# Altium PCB adj_net.PcbDoc
Units mm, origin at the board's own origin, x right, y up, seen from the top; angles counter-clockwise.
Board outline 45.51 x 24.2 mm, 4 copper layers (TopLayer, MidLayer1, MidLayer2, BottomLayer), stack 1 mm thick; 16 components, 552 nets, 49 pads, 22 vias.
Unrouted connection lines stored in the file: 13.
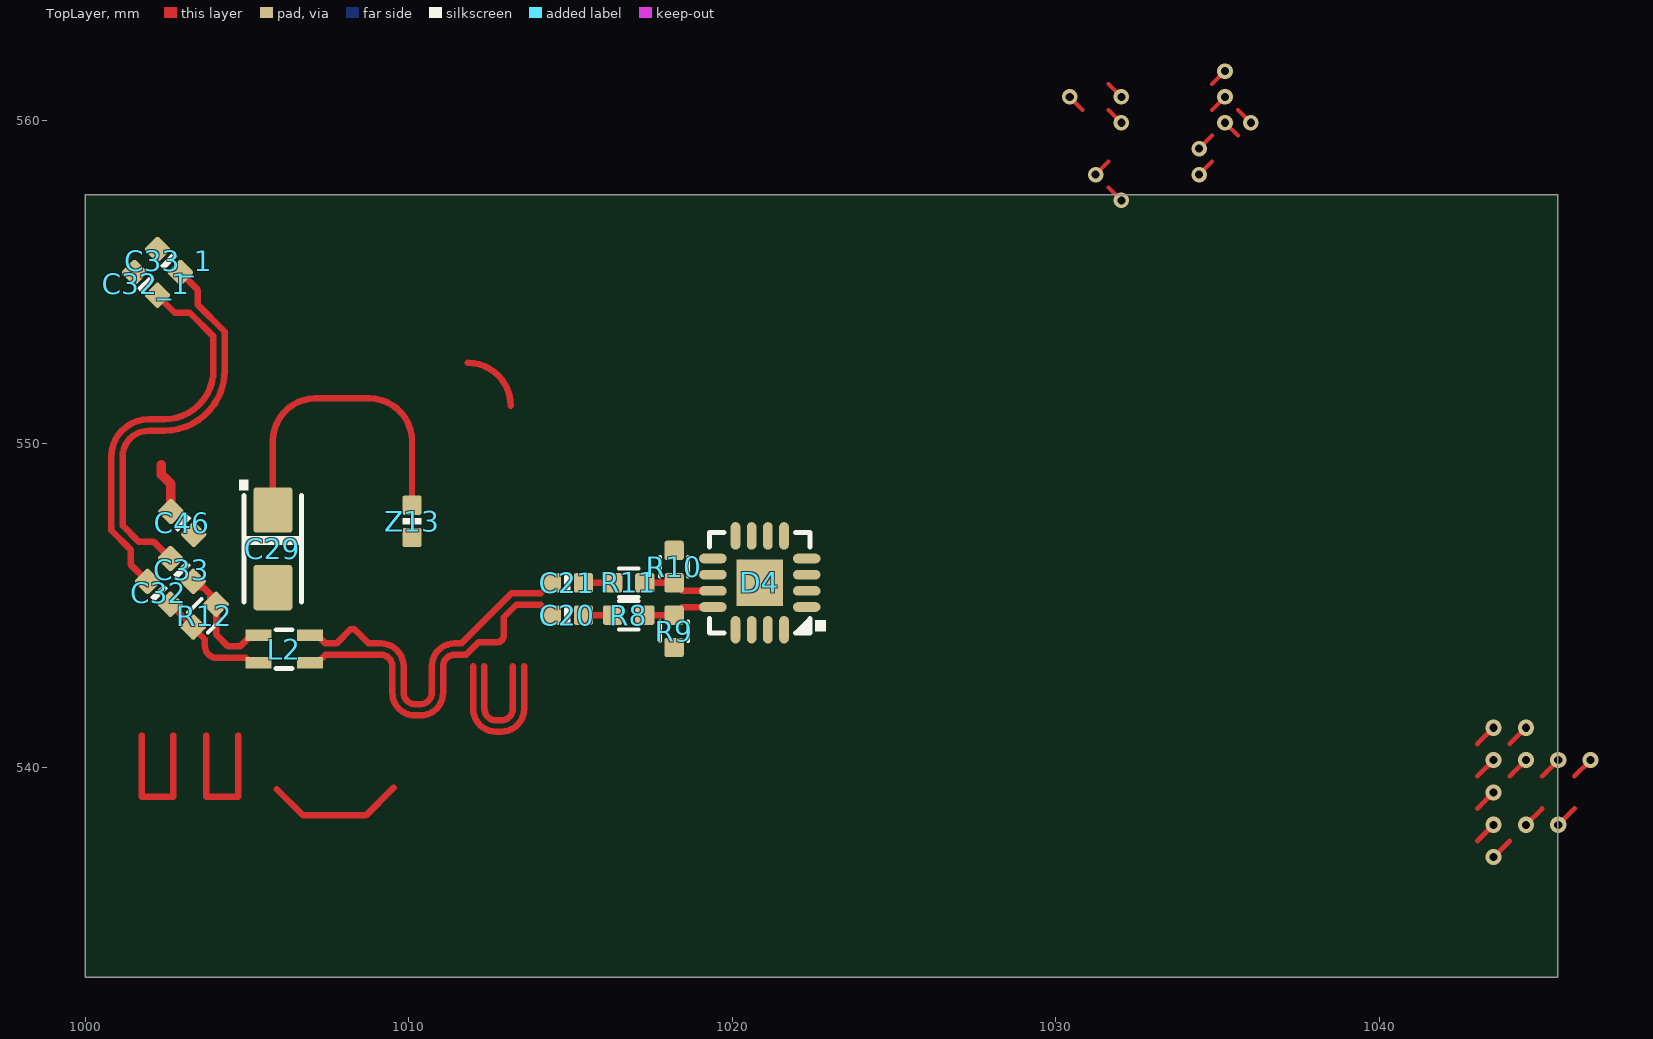
[diagram p0: TopLayer view]
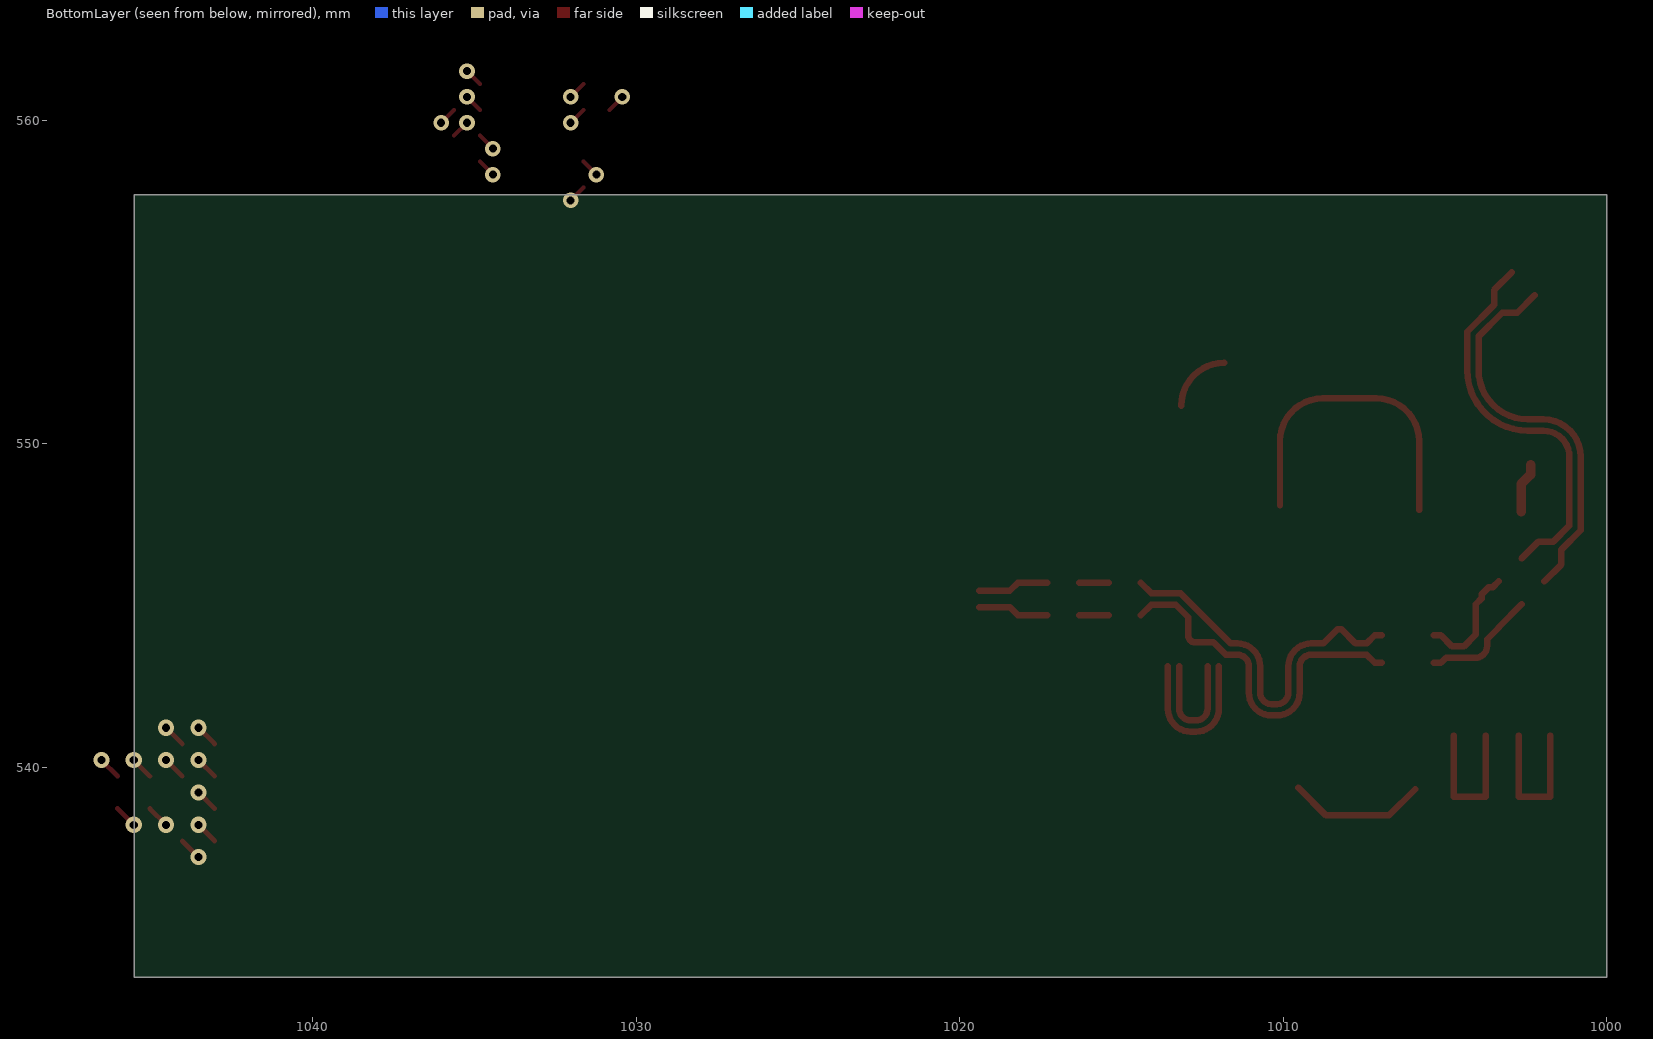
[diagram p1: BottomLayer view, seen from below]
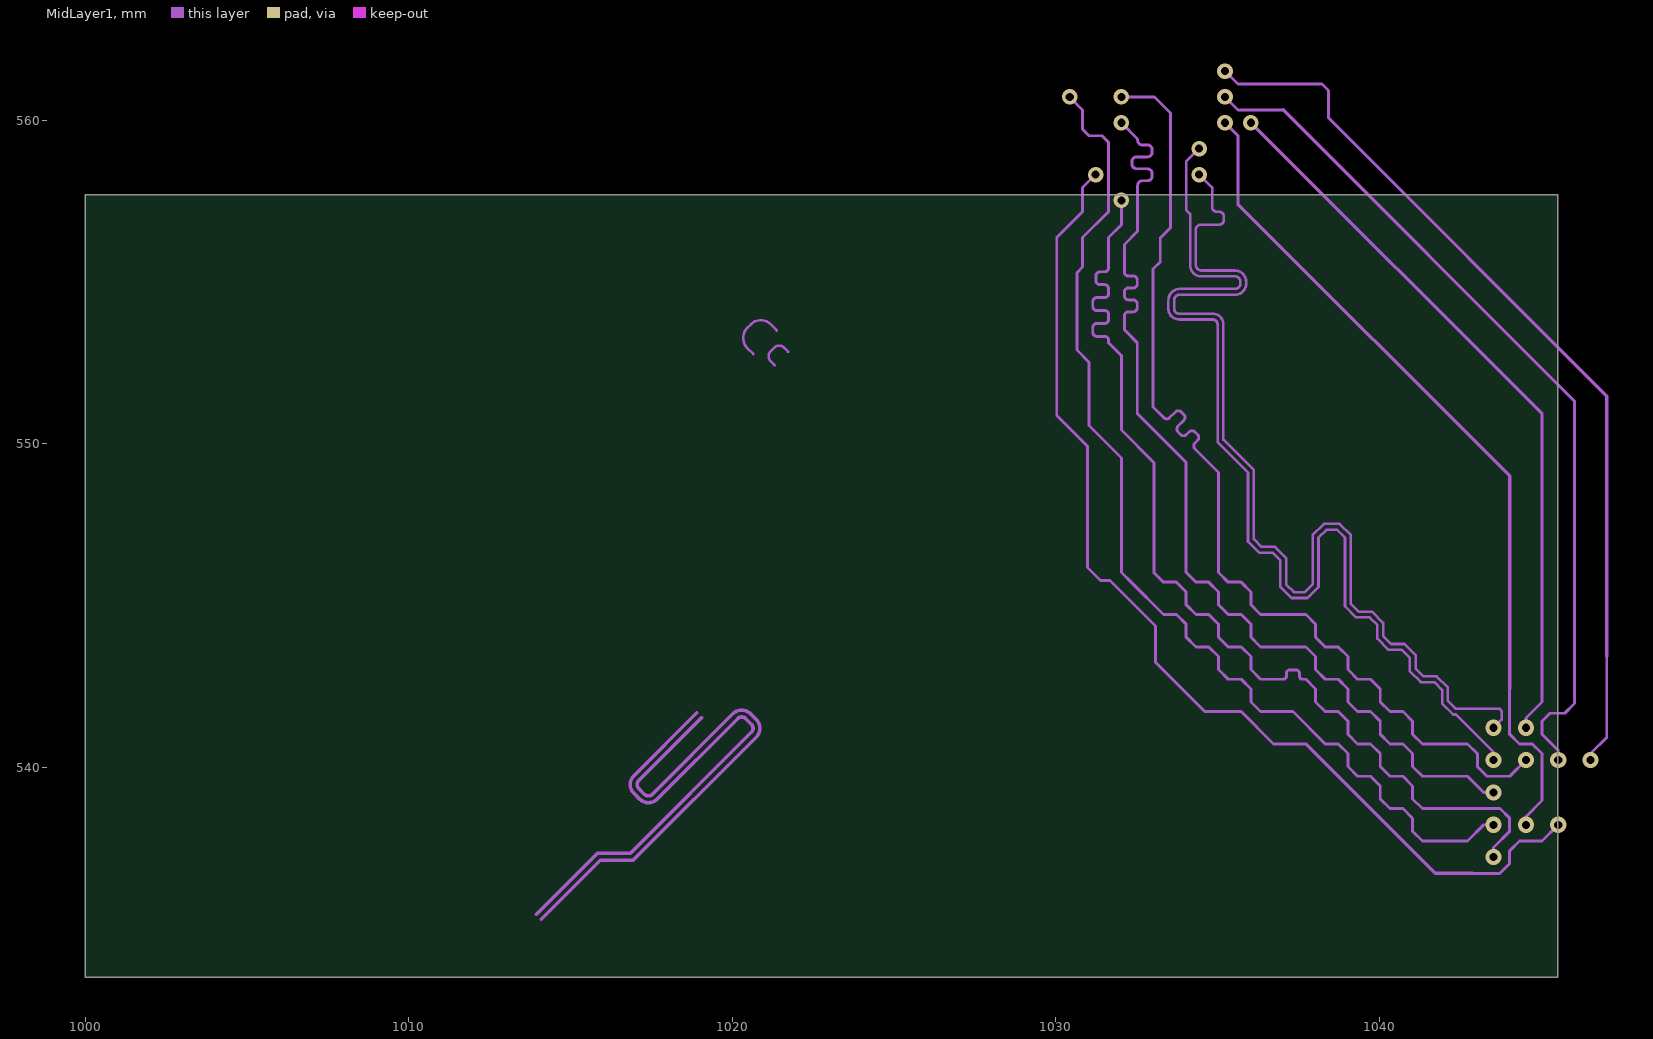
[diagram p2: MidLayer1]

## Layer stack, top to bottom
TopLayer: signal copper 0.035
Dielectric: prepreg 0.254, FR-4 High Tg, Dk 4.3
MidLayer1: signal copper 0.018
Dielectric: core 0.32, FR-4, Dk 4.8
MidLayer2: signal copper 0.018
Dielectric: prepreg 0.32, FR-4, Dk 4.8
BottomLayer: signal copper 0.035

## Board outline
1000,533.5 1045.513,533.5 1045.513,557.7 1000,557.7

## Design rules (kind name [scope] priority, off if disabled: settings)
AssemblyTestPointUsage [All] p1 off:
AssemblyTestpoint [All] p1 off: testpointundercomponent=TRUE minsize=1.016 maxsize=2.54 preferedsize=1.524 minholesize=0 maxholesize=1.016 preferedholesize=0.813 testpointgrid=0.025 usegrid=TRUE gridtolerance=0 allowsidetop=TRUE allowsidebottom=TRUE
Clearance C_TopBot_0.1mm [((IsTrack or IsArc) And (AsMM(Width) < 0.11) and OnOutside) vs ((IsTrack or IsArc) And OnOutside) or IsVia] p1 off: gap=0.1
Clearance C_DDR4_TopBot_ADDR_0.1mm [(IsTrack or IsArc) And (AsMM(Width) < 0.11) and OnOutside and InNetClass('DDR41_ADDR', 'DDR42_ADDR', 'DDR3_ADDR') vs ((IsTrack or IsArc) And (AsMM(Width) < 0.11) and OnOutside) or IsVia] p2: gap=0.1
Clearance C_Diff-Diff_0.5mm [IsTrack vs IsTrack] p3 off: gap=0.5
Clearance C_DDR4_DiffSame_0.1mm [IsTrack vs IsTrack] p4: gap=0.1
Clearance C_DiffSame_0.14mm [IsTrack vs IsTrack] p5: gap=0.1
Clearance C_DDR4-Diff_0.5mm [IsTrack and InNetClass('DDR41', 'DDR42', 'DDR3', 'QDR1', 'QDR2') and OnMid vs IsTrack and InNetClass('DDR41', 'DDR42', 'DDR3', 'QDR1', 'QDR2') and InAnyDifferentialPair and OnMid] p6 off: gap=0.5
Clearance C_DDR4-DDR4_0.3mm [IsTrack and InNetClass('DDR41', 'DDR42', 'DDR3', 'QDR1', 'QDR2', 'ZQ_DDR3') and OnMid vs IsTrack and InNetClass('DDR41', 'DDR42', 'DDR3', 'QDR1', 'QDR2', 'ZQ_DDR3') and OnMid] p7 off: gap=0.3
Clearance C_Diff_All-Via_underFMC_0.185mm [IsTrack and OnMid and InAnyDifferentialPair vs IsVia And (AsMM(X1) > 21) And (AsMM(Y1) > 84) And (AsMM(X1) < 159) And (AsMM(Y1) < 103)] p8: gap=0.185
Clearance C_Diff_DDR4-Via_underFPGA_0.12mm [InNetClass('DDR41', 'DDR42', 'DDR3', 'QDR1', 'QDR2') and InAnyDifferentialPair vs IsVia And (AsMM(X1) > 31) And (AsMM(Y1) > 35) And (AsMM(X1) < 77) And (AsMM(Y1) < 75)] p9: gap=0.12
Clearance C_DDR4-Via_underFPGA_0.2055mm [IsTrack and InNetClass('DDR41', 'DDR42', 'DDR3') vs IsVia And (AsMM(X1) > 31) And (AsMM(Y1) > 35) And (AsMM(X1) < 71) And (AsMM(Y1) < 75)] p10 off: gap=0.206
Clearance C_PolyMid-RF_Via_0.5mm [IsVia and InNetClass('RF') vs InPoly and OnMid] p11: gap=0.5
Clearance C_PolyBottom-RF_Track_0.5mm [(IsTrack or IsArc) and OnBottom and ((AsMM(Width) = 0.48) or (AsMM(Width) = 0.43) or (AsMM(Width) = 0.27) or (AsMM(Width) = 0.22) or (AsMM(Width) = 0.32) or (AsMM(Width) = 0.51) or InNetClass('RF')) vs InPoly] p12: gap=0.5
Clearance C_Poly-RF_Track_0.75mm [(IsTrack or IsArc) and ((AsMM(Width) = 0.48) or (AsMM(Width) = 0.43) or (AsMM(Width) = 0.27) or (AsMM(Width) = 0.22) or (AsMM(Width) = 0.32) or (AsMM(Width) = 0.51) or InNetClass('RF')) vs InPoly] p13: gap=0.75
Clearance C_Poly-RF_Region_0.5mm [IsRegion and InNetClass('RF') vs InPoly and InNet('GND')] p14: gap=0.5
Clearance C_Poly-RF_Pad_Conn_1.0mm [HasFootprint('MMBX*') vs InPoly and InNet('GND')] p15: gap=1
Clearance C_Poly-RF_Pad_Conn_0.7mm [HasFootprint('MMCX-SV', 'SMA-SR') vs InPoly and InNet('GND')] p16: gap=0.7
Clearance C_Poly-RF_Pad_OSC_1.0mm [HasFootprint('OSC508P9.14x14.2x5.3-4', 'TT1224') vs InPoly and InNet('GND')] p17: gap=1
Clearance C_Poly-RF_Pad_0.5mm [HasFootprint('FV1206', 'SOT89', 'SM-22', 'AT224-3', 'AT1521', 'CD542', 'WW107') vs InPoly and InNet('GND')] p18: gap=0.5
Clearance C_Poly-Via0.48_0.09mm [InPoly and Not(InNet('GND')) vs IsVia And (ViaDiameter < AsMM(0.49))] p19: gap=0.09
Clearance C_Poly-Via_0.15mm [InPoly vs IsVia or HasFootprint('TESTPIN*')] p20: gap=0.15
Clearance C_Poly-FID_0.9mm [HasFootprint('FID') vs InPoly] p21: gap=0.9
Clearance C_Poly-Diff/DDR_0.5mm [InPoly and InNet('GND') vs (InAnyDifferentialPair or (InNetClass('DDR41','DDR42'))) and (IsTrack or IsArc)] p22: gap=0.5
Clearance C_Poly-All_0.3mm [InPoly] p23: gap=0.3
Clearance C_RegionFill-KO-0mm [(IsFill or IsRegion) and InNet('SGND', 'GND') vs ((IsTrack or IsArc) and OnLayer('KeepOutLayer')) or (IsPad And (Name = 'Free-Break'))] p24: gap=0
Clearance C_Region-PS1608_0.15mm [IsRegion vs HasFootprint('PS1608')] p25: gap=0.15
Clearance C_Region-All_0.15mm [IsRegion] p26: gap=0.15
Clearance C_Track_0.15mm [IsTrack vs IsTrack] p27: gap=0.15
Clearance C_OnMid_Via_0.1mm [OnMid] p28: gap=0.1
Clearance C_0402_0.11mm [(HasFootprint('CC1005(0402)x06RND')) or (HasFootprint('CC1005(0402)x06G06')) or (HasFootprint('RC1005(0402)x04RND'))] p29: gap=0.11
Clearance C_0.125mm [All] p30: gap=0.125
ComponentClearance ComponentClearance_TP [Hasfootprint('TESTPIN')] p1 off: gap=0 collisioncheckmode=3 verticalgap=0 showdistances=FALSE
ComponentClearance [All] p2 off: gap=0.35 collisioncheckmode=3 verticalgap=0.25 showdistances=TRUE
DiffPairsRouting DiffPairsRouting_BO_0.1mm [All] p1 off: maxlimit=0.14 minlimit=0.1 mostfreqgap=0.14 toplayer_maxgap=0.1 toplayer_prefgap=0.1 midlayer1_mingap=0.14 midlayer2_mingap=0.14 bottomlayer_maxgap=0.1 bottomlayer_prefgap=0.1 maxuncoupledlength=12.7
DiffPairsRouting Diff_DDR4_76Ohm_0.1mm [InDifferentialPairClass('DDR4')] p2: maxlimit=0.1 minlimit=0.1 mostfreqgap=0.1 maxuncoupledlength=12.7
DiffPairsRouting [All] p3: maxlimit=0.15 minlimit=0.14 mostfreqgap=0.15 toplayer_mingap=0.15 midlayer1_maxgap=0.14 midlayer1_prefgap=0.14 midlayer2_maxgap=0.14 midlayer2_prefgap=0.14 bottomlayer_mingap=0.15 maxuncoupledlength=12.7
FabricationTestPointUsage TestPointUsage [All] p1 off: valid=0 allowmultiple=FALSE
FabricationTestpoint Testpoint [All] p1 off: side=3 testpointundercomponent=TRUE minsize=1.016 maxsize=2.54 preferedsize=1.524 minholesize=0.508 maxholesize=1.016 preferedholesize=0.813 testpointgrid=0.025 allowsidetop=TRUE allowsidebottom=TRUE usegrid=TRUE gridtolerance=0
FanoutControl Fanout_SOIC [IsSOIC] p1 off: bgadir=Out bgaviamode=Centered fanoutstyle=Auto fanoutdirection=Alternating viagrid=0.025 // Fanout_SOIC (Default Rule)
FanoutControl Fanout_Small [(CompPinCount < 5)] p2 off: bgadir=Out bgaviamode=Centered fanoutstyle=Auto fanoutdirection=OutThenIn viagrid=0.025 // Fanout_Small (Default Rule)
FanoutControl Fanout_LCC [IsLCC] p3 off: bgadir=Out bgaviamode=Centered fanoutstyle=Auto fanoutdirection=Alternating viagrid=0.025 // Fanout_LCC (Default Rule)
FanoutControl Fanout_Default [All] p4 off: bgadir=Out bgaviamode=Centered fanoutstyle=Auto fanoutdirection=Alternating viagrid=0.025 // Fanout_Default (Default Rule)
FanoutControl Fanout_BGA [IsBGA] p5 off: bgadir=Out bgaviamode=Centered fanoutstyle=Auto fanoutdirection=Alternating viagrid=0.025 // Fanout_BGA (Default Rule)
Height Height_Bot_1.3mm [OnBottom] p1 off: minheight=0 maxheight=1.31 prefheight=1.3
Height [All] p2: minheight=0 maxheight=25.4 prefheight=12.7
HoleSize [All] p1 off: absolutevalues=TRUE maxlimit=3.2 minlimit=0.025 maxpercent=80.000 minpercent=20.000
LayerPairs [All] p1 off: enforce=TRUE
Length [All xor InNet('GND')] p1: maxlimit=2540 minlimit=0
MinimumSolderMaskSliver [All] p1: minsoldermaskwidth=0.12
NetAntennae [All] p1: netantennaetolerance=0.5
PlaneClearance PPC_50Ohm_0.7mm [(IsPad or Isvia) and InNetClass('RF')] p1: clearance=1.05
PlaneClearance PPC_Screw_1.2mm_FMC [HasFootprintPad('FMC1*','FMC')] p2: clearance=1.2 // for hole > 2.1 mm
PlaneClearance PPC_Screw_1.2mm [IsPad And ((AsMM(HoleDiameter) > 2.1) And (Component = 'Free'))] p3: clearance=1.2 // for hole > 2.1 mm
PlaneClearance PPC_Screw_1.2mm_MG [HasFootprint('MULTIGIG-GUIDE-DC/RND')] p4: clearance=1.2 // for hole > 2.1 mm
PlaneClearance PPC_Via(0.48)_0.2mm [IsVia And (ViaDiameter < AsMM(0.49))] p5: clearance=0.2
PlaneClearance PPC_Via(All)_0.25mm [IsVia] p6: clearance=0.25
PlaneClearance PPC_All_0.4mm [All] p7: clearance=0.4
PlaneConnect PPCS_Class_Direct [InComponentClass('Poly Direct') or InPadClass('Poly Direct')] p1: planeconnectstyle=Direct reliefexpansion=0.508 reliefentries=4 reliefconductorwidth=0.254 reliefairgap=0.254
PlaneConnect PPCS_MTH_Pad_Direct [HasFootprintPad('FMC1*','FMC*') or HasFootprintPad ('','Q*') or HasFootprintPad ('','BL') or HasFootprintPad ('NGFF TYPE M 4.2MM','MH') or (IsPad And (Name Like 'Free*'))] p2: planeconnectstyle=Direct reliefexpansion=0.508 reliefentries=4 reliefconductorwidth=0.254 reliefairgap=0.254
PlaneConnect PPCS_MTH_FP_Direct [HasFootprint('TESTPIN*', 'Z-PACK*', 'MULTIGIG*', 'iPass+HD1x1*', 'HEATSINK*', 'Скоба*', 'AB4512', 'BOSS 0.8MM', 'NGFF BOSS 2.48MM', 'PB-SMD-RA-LP', 'VITA67-8PR')] p3: planeconnectstyle=Direct reliefexpansion=0.508 reliefentries=4 reliefconductorwidth=0.254 reliefairgap=0.254
PlaneConnect PPCS_12V_0.75mm [HasFootprint('POW6PR-12V')] p4: planeconnectstyle=Relief reliefexpansion=0.45 reliefentries=4 reliefconductorwidth=0.75 reliefairgap=0.3
PlaneConnect PPCS_Pad_0.4mm [IsPad] p5: planeconnectstyle=Relief reliefexpansion=0.3 reliefentries=4 reliefconductorwidth=0.3 reliefairgap=0.25
PlaneConnect PPCS_All_Direct [All] p6: planeconnectstyle=Direct reliefexpansion=0.508 reliefentries=4 reliefconductorwidth=0.254 reliefairgap=0.254
PolygonConnect PCS_Class_Direct [InComponentClass('Poly Direct') or InPadClass('Poly Direct')] p1: connectstyle=Direct reliefconductorwidth=0.254 reliefentries=4 polygonreliefangle="90 Angle" airgapwidth=0.254
PolygonConnect PCS_NotConnect_7300 [(IsComponent) And (Comment = 'TPS7A7300RGW')] p2: connectstyle=NoConnect reliefconductorwidth=0.254 reliefentries=4 polygonreliefangle="90 Angle" airgapwidth=0.254
PolygonConnect PCS_NotConnect_FMC [IsPad and OnTop and HasFootprint('FMC1CG-SHPC-10-CC')] p3: connectstyle=NoConnect reliefconductorwidth=0.254 reliefentries=4 polygonreliefangle="90 Angle" airgapwidth=0.254
PolygonConnect PCS_NotConnect [InPadClass('Pad_adress') or Hasfootprint('RCAV80P*', 'LGA40P*', 'QFN65P5X5X1-20TP3.15-I', 'TSOP65P4.4x7.8x1.2-24x6.4', 'TSOP50P3.0x4.0x1.1-16x4.9', 'SOT23-1.40x2.15x1.00-6/0.65x2.4', 'SOT723')] p4: connectstyle=NoConnect reliefconductorwidth=0.254 reliefentries=4 polygonreliefangle="90 Angle" airgapwidth=0.254
PolygonConnect PCS_BGA_Direct [HasFootprint('BGA16X16X5.21-144/1.27X0.63', 'BGA9X15X5.01-77/1.27X0.63')] p5: connectstyle=Direct reliefconductorwidth=0.254 reliefentries=4 polygonreliefangle="90 Angle" airgapwidth=0.254
PolygonConnect PCS_BGA_NotConnect [HasFootprint('BGA*')] p6: connectstyle=NoConnect reliefconductorwidth=0.3 reliefentries=4 polygonreliefangle="90 Angle" airgapwidth=0.3
PolygonConnect PCS_12V_0.75mm [HasFootprint('POW6PR-12V')] p7: connectstyle=Relief reliefconductorwidth=0.75 reliefentries=4 polygonreliefangle="45 Angle" airgapwidth=0.3
PolygonConnect PCS_SMD_Chips_0.3mm [HasFootprint('CC1005*', 'RC1005*', 'FB1005*', 'SOT23*', 'LEDC*') vs (InNet('GND'))] p8: connectstyle=Relief reliefconductorwidth=0.3 reliefentries=4 polygonreliefangle="90 Angle" airgapwidth=0.3
PolygonConnect PCS_TH_Direct [HasFootprint('FH0.8*', 'MULTIGIG*', 'IDC14PV-2mm-SMD', 'SMA-SR') or HasFootprintPad('FMC1*','FMC*')] p9: connectstyle=Direct reliefconductorwidth=0.3 reliefentries=4 polygonreliefangle="90 Angle" airgapwidth=0.3
PolygonConnect PCS_TH_0.3mm [IsPad And ((AsMM(HoleDiameter) < 2.0) And (AsMM(HoleDiameter) > 0.5))] p10: connectstyle=Relief reliefconductorwidth=0.3 reliefentries=4 polygonreliefangle="45 Angle" airgapwidth=0.3
PolygonConnect PCS_All_Direct [All] p11: connectstyle=Direct reliefconductorwidth=0.508 reliefentries=4 polygonreliefangle="90 Angle" airgapwidth=0.254
RoutingCorners [All] p1 off: cornerstyle=45-Degree minsetback=0.2 maxsetback=0.2
RoutingLayers [All] p1 off: top layer_v5=TRUE mid layer 1_v5=TRUE mid layer 2_v5=TRUE bottom layer_v5=TRUE
RoutingPriority [All] p1 off: routingpriority=0
RoutingTopology [All] p1 off: topology=Shortest
RoutingVias RoutingVias_RF_0.25/0.5mm [InNetClass('RF')] p1: holewidth=0.25 width=0.5 viastyle="Through Hole" minholewidth=0.25 minwidth=0.5 maxholewidth=0.25 maxwidth=0.5
RoutingVias [All] p2: holewidth=0.25 width=0.5 viastyle="Through Hole" minholewidth=0.25 minwidth=0.5 maxholewidth=0.3 maxwidth=0.6
ShortCircuit ShortCircuit_Fill [(IsFill or IsRegion) and InNet('SGND', 'GND') vs (IsTrack or IsArc) and OnLayer('KeepOutLayer')] p1: allowed=TRUE
ShortCircuit [All] p2: allowed=FALSE
SilkToSolderMaskClearance SilkscreenOverComponentPads [IsPad vs IsText] p1: minsilkscreentomaskgap=0.05 clearancetoexposedcopper=TRUE
SolderMaskExpansion SolderMaskExpansion_BGA [HasFootprint('BGA35x35x3.5-1156/1.0x0.45')] p1: expansion=0.05
SolderMaskExpansion [All] p2: expansion=0.025
Width Width_SE_BO_0.1mm [All and not(InAnyDifferentialPair)] p1 off: maxlimit=0.1 minlimit=0.08 preferedwidth=0.1 toplayer_minwidth=0.1 midlayer1_prefwidth=0.08 midlayer2_prefwidth=0.08 bottomlayer_minwidth=0.1 minimp=50.000000 maximp=50.000000 favimp=50.000000
Width Width_Diff_BO_0.1mm [InAnyDifferentialPair] p2 off: maxlimit=0.1 minlimit=0.08 preferedwidth=0.1 toplayer_minwidth=0.1 midlayer1_maxwidth=0.08 midlayer1_prefwidth=0.08 midlayer2_maxwidth=0.08 midlayer2_prefwidth=0.08 bottomlayer_minwidth=0.1 minimp=50.000000 maximp=50.000000 favimp=50.000000
Width Width_DDR4_Diff_L1_76Ohm_0.08mm [InNetClass('DDR41', 'DDR42', 'DDR3') and InAnyDifferentialPair] p3: maxlimit=0.15 minlimit=0.08 preferedwidth=0.1 toplayer_minwidth=0.1 midlayer1_maxwidth=0.08 midlayer1_prefwidth=0.08 midlayer2_maxwidth=0.08 midlayer2_prefwidth=0.08 bottomlayer_minwidth=0.1 minimp=50.000000 maximp=50.000000 favimp=50.000000
Width Width_Diff [InAnyDifferentialPair] p4: maxlimit=0.2 minlimit=0.08 preferedwidth=0.2 toplayer_minwidth=0.2 midlayer1_maxwidth=0.08 midlayer1_prefwidth=0.08 midlayer2_maxwidth=0.08 midlayer2_prefwidth=0.08 bottomlayer_minwidth=0.2 minimp=50.000000 maximp=50.000000 favimp=50.000000
Width Width_DDR4(ADDR)_41Ohm_0.08mm [InNetClass('DDR41_ADDR', 'DDR42_ADDR', 'DDR3_ADDR') and Not(InAnyDifferentialPair)] p5: maxlimit=0.125 minlimit=0.08 preferedwidth=0.1 toplayer_minwidth=0.1 midlayer1_maxwidth=0.08 midlayer1_prefwidth=0.08 midlayer2_maxwidth=0.08 midlayer2_prefwidth=0.08 bottomlayer_minwidth=0.1 minimp=50.000000 maximp=50.000000 favimp=50.000000
Width Width_DDR4(DQ)_39Ohm_0.089mm [InNetClass('DDR41', 'DDR42', 'DDR3', 'QDR1') and Not(InAnyDifferentialPair)] p6: maxlimit=0.15 minlimit=0.089 preferedwidth=0.1 toplayer_minwidth=0.1 midlayer1_maxwidth=0.089 midlayer1_prefwidth=0.089 midlayer2_maxwidth=0.089 midlayer2_prefwidth=0.089 bottomlayer_minwidth=0.1 minimp=50.000000 maximp=50.000000 favimp=50.000000
Width [All] p7: maxlimit=3 minlimit=0.1 preferedwidth=0.15 toplayer_minwidth=0.125 midlayer1_prefwidth=0.1 midlayer2_prefwidth=0.1 bottomlayer_minwidth=0.125 minimp=50.000000 maximp=50.000000 favimp=50.000000
4 further rules are at their usual default settings.

## Classes and differential pairs
component class msch_rf_v10-03_prepll_lmx: C29 C32 C33 C46 R12 Z13
component class msch_rf_v10-01_prepll_in: C20 C21 D4 L2 R8 R9 R10 R11
net class PWR_A: +3.3VHFB +3.3VHMIX +3.3VHPLL +3.3VHREF +3.3VHRF +3.3VZPLL +3.3VZREF +4.0VRF_UP +5.0VCH1 +5.0VCH2 +5.0VHFB +5.0VRF +5.0VZMIX_UP +5.0VZPLL +6.0VRF_UP -3.3VA_UP -5.0VRF_UP
net class A_REF: FB_LF_N FB_LF_P HPLL_01_N HPLL_01_P LO_01_N LO_01_P OSC_LMX1_IN_N OSC_LMX1_IN_P OSC_LMX1_N OSC_LMX1_P OSC_LMX2_IN_N OSC_LMX2_IN_P OSC_LMX2_N OSC_LMX2_P REF_200M_N REF_200M_P ZPLL_HF_N ZPLL_HF_OUT_N ZPLL_HF_OUT_P ZPLL_HF_P ZPLL_N ZPLL_P
net class RF: NetC22_1 NetC184_1 NetC185_1 NetC186_1 NetC187_1 NetC190_2 NetC191_2 NetC192_2 NetC193_2 NetZ29_4 NetZ29_6 ZPLL_100M_UP
net class DDDR41_D0: DDR41_DM0 DDR41_DQ00 DDR41_DQ01 DDR41_DQ02 DDR41_DQ03 DDR41_DQ04 DDR41_DQ05 DDR41_DQ06 DDR41_DQ07 DDR41_DQS0_N DDR41_DQS0_P
differential pair ZPLL: +ZPLL_P -ZPLL_N
differential pair OSC_LMX1: +OSC_LMX1_P -OSC_LMX1_N
differential pair OSC_LMX1_IN: +OSC_LMX1_IN_P -OSC_LMX1_IN_N
differential pair PS_DDR4_DQS8: +PS_DDR4_DQS8_P -PS_DDR4_DQS8_N
differential pair FMC_DP8_M2C: +FMC_DP8_M2C_N -FMC_DP8_M2C_P
differential pair DDR41_DQS0: +DDR41_DQS0_N -DDR41_DQS0_P

## Components (designator, comment, footprint, x,y, rotation, side; value= is the part's Value field where it differs from the comment)
C20 "1000" CC1005(0402)x06 1014.9,544.7 r180 top
C21 "1000" CC1005(0402)x06 1014.9,545.7 r180 top
C29 "47.0-10V ESR200" CCP3216(A)x10LB 1005.8,546.75 r90 top
C32 "0.01" CC1005(0402)x06 1002.278,545.39 r135 top
C32_1 "0.01" CC1005(0402)x06 1001.878,554.94 r135 top (schematic designator C32)
C33 "0.01" CC1005(0402)x06 1002.985,546.097 r135 top
C33_1 "0.01" CC1005(0402)x06 1002.585,555.647 r135 top (schematic designator C33)
C46 "1.0" CC1005(0402)x06 1003,547.55 r315 top
D4 "ADCLK925BCPZ" QFN50P3x3x0.8-16TP1.45-I 1020.85,545.7 r180 top
L2 "DLW21SN900SQ2" DLW21 1006.15,543.65 r180 top
R8 "10.0" RC1005(0402)x04 1016.8,544.7 r180 top
R9 "200" RC1005(0402)x04 1018.2,544.2 r270 top
R10 "200" RC1005(0402)x04 1018.2,546.2 r90 top
R11 "10.0" RC1005(0402)x04 1016.8,545.7 r180 top
R12 "100" RC1005(0402)x04 1003.692,544.683 r225 top
Z13 "BLM15HG601SN1" FB1005(0402)x05 1010.1,547.6 r90 top

## Footprints (in the part's own frame and the unit in brackets; to place one, negate y for a bottom-side part, rotate by r counter-clockwise, add the part's x,y. Pads: shape width x height; smd on the part's side, far side on the other; paste and mask are expansions set on the pad)
CC1005(0402)x06 [mm] "1005(0402) Chip-Capacitor"
  rrect25% 0.6x0.6 smd paste+0.025 mask+0.025: 1(-0.5,0) 2(0.5,0)
  silkscreen extent -0.1,-0.3 0.1,0.3, body extent -0.5,-0.25 0.5,0.25, height 0.6
CCP3216(A)x10LB [mm] "3216(I) Tantalum Chip-Capacitor H=1.0mm Black"
  rrect14% 1.4x1.2 smd: 1(1.2,0) 2(-1.2,0)
  silkscreen extent -1.65,-0.89 2.15,1.05, body extent -1.6,-0.8 1.6,0.8, height 1
DLW21 [mm] "DLW21 Common Mode Choke Coil (Murata)"
  rect 0.8x0.35 smd: 1(-0.8,0.425) 2(0.8,0.425) 3(0.8,-0.425) 4(-0.8,-0.425)
  silkscreen extent -0.25,-0.6 0.25,0.6, body extent -1.1,-0.7 1.1,0.7, height 1.1
FB1005(0402)x05 [mm] "1005(0402) Chip-Ferrite 0.55mm Height"
  rrect25% 0.6x0.6 smd paste+0.025 mask+0.025: 1(-0.5,0) 2(0.5,0)
  silkscreen extent -0.1,-0.3 0.1,0.3, body extent -0.5,-0.25 0.5,0.25, height 0.55
QFN50P3x3x0.8-16TP1.45-I [mm] "QFN Type I 0.5mm Pitch, 16 Pin, 3.0mm X 3.0mm X 0.8mm Body with Thermal Pad 1.45mm"
  oval 0.85x0.3 smd: 1(-1.45,0.75) 2(-1.45,0.25) 3(-1.45,-0.25) 4(-1.45,-0.75) 9(1.45,-0.75) 10(1.45,-0.25) 11(1.45,0.25) 12(1.45,0.75)
  oval 0.3x0.85 smd: 5(-0.75,-1.45) 6(-0.25,-1.45) 7(0.25,-1.45) 8(0.75,-1.45) 13(0.75,1.45) 14(0.25,1.45) 15(-0.25,1.45) 16(-0.75,1.45)
  rect 1.45x1.45 smd paste-0.75 mask-0.75: TP(0,0)
  silkscreen extent -2.05,-1.55 1.55,1.55, body extent -1.52,-1.52 1.53,1.53, height 0.8
RC1005(0402)x04 [mm] "1005(0402) Chip-Resistor"
  rrect25% 0.6x0.6 smd paste+0.025 mask+0.025: 1(-0.5,0) 2(0.5,0)
  silkscreen extent -0.3,-0.44 0.3,0.44, body extent -0.5,-0.25 0.5,0.25, height 0.4

## Part data
C20 C21: library part "CC0402 NP0 pF1000 V50", "Ceramic Chip-capacitor 0402"
C29: library part "SMEI 47.0-10V ESR200", "Tantalum Polymer SMD capacitor size I"
C32 C32_1 C33 C33_1: library part "CC0402 X7R uF0.01 V25", "Ceramic Chip-capacitor 0402"
C46: library part "CC0402 X5R uF1.0 V25", "Ceramic Chip-capacitor 0402"
D4: "Ultrafast ECL Clock/Data Buffer 1:2"
L2: "Chip Common Mode Wire Wound EMI Suppression Filters (EMIFRL)"
R8 R11: library part "1% R0402-10.0", "Chip Resistor 0402"
R9 R10: library part "1% R0402-200", "Chip Resistor 0402"
R12: library part "1% R0402-100", "Chip Resistor 0402"
Z13: "SMD Ferrite Bead 0.3A 600 Ohm(100MHz) for GHz Band Noise"

## Via types
v1: diameter 0.5, hole 0.25, TopLayer to BottomLayer, tented both sides, 11 vias
v2: diameter 0.48, hole 0.25, TopLayer to BottomLayer, tented both sides, 11 vias

## Nets (pads, with @x,y where several pads share a name; then routed paths per layer and width w, separated by ;. In a path a pad name is that pad's centre, name@x,y a point inside that pad or via, vN(x,y) a via of type N, cw(c..) or ccw(c..) an arc to the next point about the centre after c; other vN are vias at no path point)
+3.3VHFB: 
+3.3VHMIX: 
+3.3VHPLL: 
+3.3VHREF: 
+3.3VHRF: 
+3.3VZPLL: Z13.1
+3.3VZREF: 
+4.0VRF_UP: 
+5.0VCH1: 
+5.0VCH2: 
+5.0VHFB: 
+5.0VRF: 
+5.0VZMIX_UP: 
+5.0VZPLL: 
+6.0VRF_UP: 
-3.3VA_UP: 
-5.0VRF_UP: 
DDR41_DM0:  | length 33.2
  TopLayer w0.125: 1031.63,557.919 v2(1032.03,557.519)
  TopLayer w0.15: v1(1043.53,537.219) 1044.03,537.719
  MidLayer1 w0.089: v2(1032.03,557.519) 1032.03,556.769 1031.63,556.369 1031.63,555.433 cw(c1031.511,555.433) 1031.511,555.314 1031.362,555.314 ccw(c1031.362,555.194) 1031.243,555.194 1031.243,555.034 ccw(c1031.362,555.034) 1031.362,554.915 1031.511,554.915 cw(c1031.511,554.795) 1031.63,554.795 1031.63,554.635 cw(c1031.511,554.635) 1031.511,554.516 1031.263,554.516 ccw(c1031.263,554.396) 1031.144,554.396 1031.144,554.236 ccw(c1031.263,554.236) 1031.263,554.117 1031.511,554.117 cw(c1031.511,553.997) 1031.63,553.997 1031.63,553.837 cw(c1031.511,553.837) 1031.511,553.718 1031.263,553.718 ccw(c1031.263,553.598) 1031.144,553.598 1031.144,553.438 ccw(c1031.263,553.438) 1031.263,553.319 1031.511,553.319 cw(c1031.511,553.199) 1031.63,553.199 1031.63,553.119 1032.03,552.719 1032.03,550.419 1033.03,549.419 1033.03,546.019 1033.33,545.719 1033.73,545.719 1034.03,545.419 1034.03,545.019 1034.33,544.719 1034.73,544.719 1035.03,544.419 1035.03,544.019 1035.33,543.719 1035.73,543.719 1036.03,543.419 1036.03,543.019 1036.33,542.719 1037.032,542.719 ccw(c1037.032,542.819) 1037.132,542.819 1037.132,542.906 cw(c1037.232,542.906) 1037.232,543.006 1037.431,543.006 cw(c1037.431,542.906) 1037.531,542.906 1037.531,542.819 ccw(c1037.631,542.819) 1037.631,542.719 1037.73,542.719 1038.03,542.419 1038.03,542.019 1038.33,541.719 1038.73,541.719 1039.03,541.419 1039.03,541.019 1039.33,540.719 1039.73,540.719 1040.03,540.419 1040.03,540.019 1040.33,539.719 1040.73,539.719 1041.03,539.419 1041.03,539.019 1041.33,538.719 1043.73,538.719 1044.03,538.419 1044.03,538.019 1043.53,537.519 v1(1043.53,537.219)
DDR41_DQ00:  | length 27.5
  TopLayer w0.125: v2(1035.23,559.919) 1035.63,559.519
  TopLayer w0.15: v1(1044.53,538.219) 1045.03,538.719
  MidLayer1 w0.089: v2(1035.23,559.919) 1035.63,559.519 1035.63,558.821 ; 1044.03,542.419 1044.03,541.019 1044.33,540.719 1044.73,540.719 1045.03,540.419 1045.03,538.969 1044.53,538.469 v1(1044.53,538.219)
  MidLayer1 w0.1: 1035.63,558.821 1035.63,557.404 1044.03,549.004 1044.03,542.419
DDR41_DQ01:  | length 34.3
  TopLayer w0.125: v2(1031.23,558.319) 1031.63,558.719
  TopLayer w0.15: v1(1045.53,538.219) 1046.03,538.719
  MidLayer1 w0.089: v2(1031.23,558.319) 1030.83,557.919 1030.83,557.169 1030.03,556.369 1030.03,550.869 1030.98,549.919 1030.98,546.169 1031.38,545.769 1031.68,545.769 1033.08,544.369 1033.08,543.244 1034.605,541.719 1035.73,541.719 1036.73,540.719 1037.73,540.719 ; 1042.882,536.719 1043.73,536.719 1044.03,537.019 1044.03,537.419 1044.33,537.719 1045.03,537.719 v1(1045.53,538.219)
  MidLayer1 w0.1: 1037.73,540.719 1041.73,536.719 1042.882,536.719
DDR41_DQ02:  | length 28
  TopLayer w0.125: 1034.83,560.319 v2(1035.23,560.719)
  TopLayer w0.15: 1045.03,539.719 v1(1045.53,540.219)
  MidLayer1 w0.089: v2(1035.23,560.719) 1035.63,560.319 1037.03,560.319 ; v1(1045.53,540.219) 1045.53,540.519 1045.03,541.019 1045.03,541.419 1045.28,541.669 1045.73,541.669 1046.03,541.969 1046.03,543.419
  MidLayer1 w0.1: 1037.03,560.319 1046.03,551.319 1046.03,543.419
DDR41_DQ03:  | length 32.9
  TopLayer w0.125: 1031.63,560.319 v2(1032.03,559.919)
  TopLayer w0.15: 1043.03,538.719 v1(1043.53,539.219)
  MidLayer1 w0.089: v2(1032.03,559.919) 1032.53,559.419 1032.53,559.382 ccw(c1032.678,559.382) 1032.678,559.235 1032.832,559.235 cw(c1032.832,559.087) 1032.979,559.087 1032.979,559.013 cw(c1032.832,559.013) 1032.832,558.866 1032.5,558.866 ccw(c1032.5,558.718) 1032.352,558.718 1032.352,558.644 ccw(c1032.5,558.644) 1032.5,558.497 1032.832,558.497 cw(c1032.832,558.349) 1032.979,558.349 1032.979,558.275 cw(c1032.832,558.275) 1032.832,558.128 1032.678,558.128 ccw(c1032.678,557.98) 1032.53,557.98 1032.53,556.569 1032.119,556.158 1032.119,555.311 ccw(c1032.248,555.311) 1032.248,555.182 1032.39,555.182 cw(c1032.39,555.053) 1032.519,555.053 1032.519,554.942 cw(c1032.39,554.942) 1032.39,554.813 1032.248,554.813 ccw(c1032.248,554.684) 1032.119,554.684 1032.119,554.573 ccw(c1032.248,554.573) 1032.248,554.444 1032.39,554.444 cw(c1032.39,554.315) 1032.519,554.315 1032.519,554.204 cw(c1032.39,554.204) 1032.39,554.075 1032.248,554.075 ccw(c1032.248,553.946) 1032.119,553.946 1032.119,553.522 1032.519,553.122 1032.519,550.93 1034.03,549.419 1034.03,546.019 1034.33,545.719 1034.73,545.719 1035.03,545.419 1035.03,545.019 1035.33,544.719 1035.73,544.719 1036.03,544.419 1036.03,544.019 1036.33,543.719 1037.73,543.719 1038.03,543.419 1038.03,543.019 1038.33,542.719 1038.73,542.719 1039.03,542.419 1039.03,542.019 1039.33,541.719 1039.73,541.719 1040.03,541.419 1040.03,541.019 1040.33,540.719 1040.73,540.719 1041.03,540.419 1041.03,540.019 1041.33,539.719 1042.73,539.719 1043.23,539.219 v1(1043.53,539.219)
DDR41_DQ04:  | length 23.9
  TopLayer w0.125: 1035.63,560.319 v2(1036.03,559.919)
  TopLayer w0.15: 1044.03,540.719 v1(1044.53,541.219)
  MidLayer1 w0.089: v1(1044.53,541.219) 1044.53,541.519 1045.03,542.019 1045.03,543.419
  MidLayer1 w0.1: v2(1036.03,559.919) 1045.03,550.919 1045.03,543.419
DDR41_DQ05:  | length 34.2
  TopLayer w0.125: v2(1030.43,560.719) 1030.83,560.319
  TopLayer w0.15: 1043.03,537.719 v1(1043.53,538.219)
  MidLayer1 w0.089: v2(1030.43,560.719) 1030.83,560.319 1030.83,559.719 1031.03,559.519 1031.43,559.519 1031.63,559.319 1031.63,557.169 1030.83,556.369 1030.83,555.457 1030.655,555.281 1030.655,552.895 1031.03,552.519 1031.03,550.561 1032.03,549.561 1032.03,546.019 1032.33,545.719 1033.33,544.719 1033.73,544.719 1034.03,544.419 1034.03,544.019 1034.33,543.719 1034.73,543.719 1035.03,543.419 1035.03,543.019 1035.33,542.719 1035.73,542.719 1036.03,542.419 1036.03,542.019 1036.33,541.719 1037.33,541.719 1038.33,540.719 1038.73,540.719 1039.03,540.419 1039.03,540.019 1039.33,539.719 1039.73,539.719 1040.03,539.419 1040.03,539.019 1040.33,538.719 1040.73,538.719 1041.03,538.419 1041.03,538.019 1041.33,537.719 1042.73,537.719 1043.23,538.219 v1(1043.53,538.219)
DDR41_DQ06:  | length 29.2
  TopLayer w0.125: 1034.83,561.119 v2(1035.23,561.519)
  TopLayer w0.15: 1046.03,539.719 v1(1046.53,540.219)
  MidLayer1 w0.089: v2(1035.23,561.519) 1035.63,561.119 1038.23,561.119 1038.43,560.919 1038.43,560.069 ; v1(1046.53,540.219) 1046.53,540.419 1047.03,540.919 1047.03,543.419
  MidLayer1 w0.1: 1038.43,560.069 1047.03,551.469 1047.03,543.419
DDR41_DQ07:  | length 33.3
  TopLayer w0.125: 1031.63,561.119 v2(1032.03,560.719)
  TopLayer w0.15: 1044.03,539.719 v1(1044.53,540.219)
  MidLayer1 w0.089: v2(1032.03,560.719) 1033.048,560.719 1033.546,560.222 1033.546,556.675 1033.23,556.36 1033.23,555.619 1033.008,555.397 1033.008,551.133 1033.337,550.804 ccw(c1033.428,550.896) 1033.519,550.804 1033.696,550.981 cw(c1033.787,550.89) 1033.878,550.981 ; 1033.879,550.981 1033.957,550.903 cw(c1033.866,550.811) 1033.957,550.72 1033.78,550.543 ccw(c1033.871,550.452) 1033.78,550.361 1033.858,550.283 ccw(c1033.95,550.374) 1034.041,550.282 ; 1034.041,550.283 1034.12,550.362 cw(c1034.211,550.27) 1034.303,550.362 1034.381,550.283 cw(c1034.29,550.192) 1034.381,550.101 1034.302,550.022 ccw(c1034.393,549.93) 1034.302,549.839 1035.03,549.111 1035.03,546.019 1035.33,545.719 1035.73,545.719 1036.03,545.419 1036.03,545.019 1036.33,544.719 1037.73,544.719 1038.03,544.419 1038.03,544.019 1038.33,543.719 1038.73,543.719 1039.03,543.419 1039.03,543.019 1039.33,542.719 1039.73,542.719 1040.03,542.419 1040.03,542.019 1040.33,541.719 1040.73,541.719 1041.03,541.419 1041.03,541.019 1041.33,540.719 1042.73,540.719 1043.03,540.419 1043.03,540.019 1043.33,539.719 1044.03,539.719 v1(1044.53,540.219)
DDR41_DQS0_N:  | length 34.3
  TopLayer w0.125: v2(1034.43,558.319) 1034.83,558.719
  TopLayer w0.15: 1043.03,540.719 v1(1043.53,541.219)
  MidLayer1 w0.08: v2(1034.43,558.319) 1034.83,557.919 1034.83,557.321 ccw(c1034.983,557.321) 1034.983,557.169 1035.044,557.169 cw(c1035.044,557.017) 1035.197,557.017 1035.197,556.921 cw(c1035.044,556.921) 1035.044,556.769 1034.483,556.769 ccw(c1034.483,556.617) 1034.33,556.617 1034.33,555.521 ccw(c1034.497,555.521) 1034.497,555.354 1035.538,555.354 cw(c1035.538,555.008) 1035.885,555.008 1035.885,554.951 cw(c1035.538,554.951) 1035.538,554.604 1033.827,554.604 ccw(c1033.827,554.438) 1033.661,554.438 1033.661,554.171 ccw(c1033.813,554.171) 1033.813,554.019 1034.848,554.019 cw(c1034.848,553.687) 1035.18,553.687 1035.18,550.124 1036.12,549.184 1036.12,547.049 1036.36,546.809 1036.775,546.809 1037.12,546.463 1037.12,545.649 1037.36,545.409 1037.7,545.409 1037.94,545.649 1037.94,547.173 1038.286,547.519 1038.775,547.519 1039.12,547.173 1039.12,545.049 1039.36,544.809 1039.775,544.809 1040.12,544.463 1040.12,544.049 1040.36,543.809 1040.775,543.809 1041.12,543.463 1041.12,543.049 1041.36,542.809 1041.775,542.809 1042.12,542.463 1042.12,542.049 1042.36,541.809 1043.714,541.809 1043.78,541.743 1043.78,541.469 v1(1043.53,541.219)
DDR41_DQS0_P:  | length 34.3
  TopLayer w0.125: v2(1034.43,559.119) 1034.83,559.519
  TopLayer w0.15: 1043.03,539.719 v1(1043.53,540.219)
  MidLayer1 w0.08: v2(1034.43,559.119) 1034.03,558.719 1034.03,557.219 1034.15,557.099 1034.15,555.521 ccw(c1034.497,555.521) 1034.497,555.174 1035.538,555.174 cw(c1035.538,555.008) 1035.705,555.008 1035.705,554.951 cw(c1035.538,554.951) 1035.538,554.784 1033.827,554.784 ccw(c1033.827,554.438) 1033.481,554.438 1033.481,554.171 ccw(c1033.813,554.171) 1033.813,553.839 1034.848,553.839 cw(c1034.848,553.687) 1035,553.687 1035,550.049 1035.94,549.109 1035.94,546.975 1036.286,546.629 1036.7,546.629 1036.94,546.389 1036.94,545.575 1037.286,545.229 1037.775,545.229 1038.12,545.575 1038.12,547.098 1038.36,547.339 1038.7,547.339 1038.94,547.098 1038.94,544.975 1039.286,544.629 1039.7,544.629 1039.94,544.389 1039.94,543.975 1040.286,543.629 1040.7,543.629 1040.94,543.389 1040.94,542.975 1041.286,542.629 1041.7,542.629 1041.94,542.389 1041.94,541.975 1042.286,541.629 1042.366,541.629 1043.53,540.464 v1(1043.53,540.219)
FB_LF: 
FB_LF_N: 
FB_LF_P: 
FMC_DP8_M2C_N: D4.6 | length 1.2
  MidLayer1 w0.08: 1021.304,552.43 1021.184,552.549 cw(c1021.336,552.701) 1021.184,552.852 1021.299,552.967 cw(c1021.45,552.815) 1021.602,552.967 1021.721,552.847
FMC_DP8_M2C_P: D4.5 | length 2.1
  MidLayer1 w0.08: 1020.651,552.771 1020.461,552.962 cw(c1020.768,553.268) 1020.461,553.575 1020.576,553.69 cw(c1020.883,553.383) 1021.189,553.69 1021.38,553.5
GND: C29.2 C46.2 D4.7 D4.14 D4.TP R9.2 R10.2
HFAMP: 
HFB_S1#_UP: 
HFB_S2#_UP: 
HPLL_01: 
HPLL_01_N: 
HPLL_01_P: 
HPLL_8G: 
HPLL_100M_UP: 
HPLL_CP: 
HPLL_FB: 
HPLL_FB_46G: 
HPLL_MUX: 
HPLL_RFN: 
HPLL_RFP: 
HPLL_VT: 
HPLLF: 
LO_01_N: 
LO_01_P: 
LPN#_UP: 
NetC1_2: 
NetC2_1: 
NetC2_2: 
NetC3_1: 
NetC5_1: 
NetC5_2: 
NetC6_1: 
NetC6_2: 
NetC7_1: 
NetC8_1: 
NetC8_2: 
NetC9_1: 
NetC9_2: 
NetC11_1: 
NetC11_2: 
NetC12_1: 
NetC12_2: D4.1
NetC13_2: D4.2 D4.15 D4.16
NetC14_1: 
NetC16_1: D4.8 D4.13
NetC20_1: C20.1 R8.2 | length 0.9
  TopLayer w0.2: C20.1 R8.2
NetC21_1: C21.1 R11.2 | length 0.9
  TopLayer w0.2: C21.1 R11.2
NetC22_1: 
NetC22_2: 
NetC23_1: 
NetC24_1: 
NetC26_1: 
NetC28_2: 
NetC29_1: C29.1 Z13.2 | length 19
  TopLayer w0.2: 1003.743,540.979 1003.743,539.082 1004.723,539.082 1004.723,540.979 ; C29.1 1005.8,550.079 cw(c1007.121,550.079) 1007.121,551.4 1008.779,551.4 cw(c1008.779,550.079) 1010.1,550.079 Z13.2 ; 1005.922,539.322 1006.736,538.508 1008.675,538.508 1009.537,539.371
NetC30_2: 
NetC31_2: 
NetC37_1: 
NetC38_1: 
NetC41_2: 
NetC42_1: 
NetC43_2: 
NetC44_1: 
NetC45_1: 
NetC45_2: 
NetC46_1: C46.1 | length 1.6
  TopLayer w0.3: 1002.35,549.35 1002.35,549.05 1002.646,548.754 C46.1
NetC47_2: 
NetC48_2: 
NetC49_1: 
NetC49_2: 
NetC50_1: 
NetC50_2: 
NetC51_1: 
NetC51_2: 
NetC52_1: 
NetC52_2: 
NetC53_1: 
NetC54_1: 
NetC55_1: 
NetC56_1: 
NetC56_2: 
NetC57_1: 
NetC60_1: 
NetC60_2: 
NetC61_1: 
NetC62_1: 
NetC62_2: 
NetC65_1: 
NetC65_2: 
NetC66_1: 
NetC67_1: 
NetC68_1: 
NetC69_1: 
NetC70_1: 
NetC70_2: 
NetC71_1: 
NetC74_1: 
NetC75_1: 
NetC76_1: 
NetC78_2: 
NetC80_2: 
NetC81_2: 
NetC84_1: 
NetC85_1: 
NetC86_1: 
NetC87_1: 
NetC88_1: 
NetC90_2: 
NetC91_2: 
NetC96_2: 
NetC97_1: 
NetC97_2: 
NetC98_2: 
NetC99_1: 
NetC100_2: 
NetC101_1: 
NetC102_1: 
NetC104_2: 
NetC105_1: 
NetC105_2: 
NetC107_2: 
NetC108_2: 
NetC111_2: 
NetC113_1: 
NetC113_2: 
NetC115_2: 
NetC116_2: 
NetC117_1: 
NetC120_1: 
NetC120_2: 
NetC121_1: 
NetC121_2: 
NetC122_1: 
NetC123_2: 
NetC124_2: 
NetC125_2: 
NetC127_1: 
NetC132_1: 
NetC136_2: 
NetC137_1: 
NetC138_2: 
NetC139_1: 
NetC140_1: 
NetC141_2: 
NetC142_2: 
NetC143_2: 
NetC145_2: 
NetC147_1: 
NetC148_1: 
NetC149_1: 
NetC150_1: 
NetC150_2: 
NetC151_1: 
NetC152_1: 
NetC153_1: 
NetC153_2: 
NetC155_2: 
NetC156_1: 
NetC157_1: 
NetC160_1: 
NetC161_1: 
NetC163_2: 
NetC164_2: 
NetC167_1: 
NetC168_1: 
NetC169_1: 
NetC170_1: 
NetC171_1: 
NetC173_2: 
NetC174_2: 
NetC179_2: 
NetC180_2: 
NetC183_1: 
NetC183_2: 
NetC184_1: 
NetC184_2: 
NetC185_1: 
NetC185_2: 
NetC186_1: 
NetC186_2: 
NetC187_1: 
NetC187_2: 
NetC188_1: 
NetC190_1: 
NetC190_2: 
NetC191_1: 
NetC191_2: 
NetC192_1: 
NetC192_2: 
NetC193_1: 
NetC193_2: 
NetC194_1: 
NetC196_1: 
NetC197_2: 
NetC200_1: 
NetC203_1: 
NetC203_2: 
NetC204_1: 
NetC205_1: 
NetC206_2: 
NetC207_1: 
NetC208_1: 
NetC208_2: 
NetC209_1: 
NetC209_2: 
NetC210_1: 
NetC210_2: 
NetC211_1: 
NetC211_2: 
NetC212_1: 
NetC213_1: 
NetC216_1: 
NetC217_2: 
NetC218_1: 
NetC218_2: 
NetC219_2: 
NetC220_1: 
NetC220_2: 
NetC221_1: 
NetC222_1: 
NetC223_2: 
NetC224_1: 
NetC225_1: 
NetC225_2: 
NetC226_1: 
NetC226_2: 
NetC227_2: 
NetC228_1: 
NetC233_1: 
NetC234_1: 
NetC235_1: 
NetC236_1: 
NetC239_1: 
NetC239_2: 
NetC240_1: 
NetC240_2: 
NetC241_1: 
NetC241_2: 
NetC242_1: 
NetC242_2: 
NetC243_2: 
NetC244_2: 
NetC247_1: 
NetC248_1: 
NetC248_2: 
NetC250_1: 
NetC250_2: 
NetC251_2: 
NetC252_1: 
NetC252_2: 
NetC253_1: 
NetC254_1: 
NetC255_1: 
NetC257_1: 
NetC257_2: 
NetC258_1: 
NetC258_2: 
NetC259_1: 
NetC259_2: 
NetC260_2: 
NetC261_1: 
NetC261_2: 
NetC262_1: 
NetC263_1: 
NetC266_1: 
NetC266_2: 
NetC267_1: 
NetC269_1: 
NetC269_2: 
NetC270_2: 
NetC271_1: 
NetC274_1: 
NetC275_1: 
NetC276_1: 
NetC277_1: 
NetC278_1: 
NetC279_1: 
NetC281_1: 
NetC283_1: 
NetC285_1: 
NetC286_1: 
NetC287_1: 
NetC288_1: 
NetC295_1: 
NetC296_1: 
NetC297_1: 
NetC304_1: 
NetC305_1: 
NetC306_1: 
NetC307_1: 
NetC308_1: 
NetC310_1: 
NetC312_1: 
NetC314_1: 
NetC317_1: 
NetC318_1: 
NetC319_1: 
NetC320_1: 
NetC321_1: 
NetC330_1: 
NetC331_1: 
NetC332_1: 
NetC337_1: 
NetC338_2: 
NetC344_1: 
NetC345_1: 
NetC346_1: 
NetC347_1: 
NetC349_1: 
NetC351_1: 
NetC354_1: 
NetC357_1: 
NetC360_1: 
NetC362_1: 
NetC363_1: 
NetC364_1: 
NetC365_1: 
NetC366_1: 
NetC367_1: 
NetC371_2: 
NetC372_2: 
NetC373_2: 
NetC377_1: 
NetC377_2: 
NetC378_1: 
NetC378_2: 
NetC379_1: 
NetC379_2: 
NetD1_2: 
NetD2_2: 
NetD4_11: D4.11 R10.1 R11.1 | length 2.2
  TopLayer w0.2: R11.1 R10.1 1018.45,545.45 D4.11
NetD4_12: D4.12 R8.1 R9.1 | length 2.2
  TopLayer w0.2: R8.1 R9.1 1018.45,544.95 D4.12
NetD6_21: 
NetD7_2: 
NetD7_3: 
NetD9_9: 
NetD9_10: 
NetD12_1: 
NetD13_4: 
NetD14_1: 
NetD14_3: 
NetD15_4: 
NetD16_4: 
NetD16_6: 
NetD17_5: 
NetD18_5: 
NetD19_5: 
NetD24_1: 
NetD27_1: 
NetD27_3: 
NetD28_4: 
NetD28_6: 
NetD29_5: 
NetD30_1: 
NetD30_5: 
NetD31_1: 
NetD31_5: 
NetD32_4: 
NetD33_4: 
NetD37_2: 
NetD37_4: 
NetD38_2: 
NetD40_2: 
NetD45_14: 
NetD50_5: 
NetD51_2: 
NetD51_5: 
NetD53_10: 
NetD53_11: 
NetD55_5: 
NetD55_6: 
NetD55_7: 
NetD62_6: 
NetD63_6: 
NetD64_6: 
NetD65_3: 
NetD66_6: 
NetD67_6: 
NetD68_6: 
NetD69_5: 
NetD69_6: 
NetD70_5: 
NetD70_7: 
NetD71_5: 
NetD71_7: 
NetD72_5: 
NetD73_2: 
NetD74_2: 
NetD75_2: 
NetH1_2: 
NetH2_2: 
NetH3_1: 
NetH4_1: 
NetR7_1: 
NetR7_2: 
NetR13_2: 
NetR14_2: 
NetR15_2: 
NetR16_2: 
NetR17_2: 
NetR18_2: 
NetR21_1: 
NetR21_2: 
NetR34_2: 
NetR35_2: 
NetR53_1: 
NetR54_1: 
NetR55_1: 
NetR60_1: 
NetR61_1: 
NetR62_1: 
NetR63_1: 
NetR64_1: 
NetR71_1: 
NetR72_1: 
NetR89_1: 
NetR90_1: 
NetR95_1: 
NetR96_1: 
NetR96_2: 
NetR100_2: 
NetR103_2: 
NetR105_2: 
NetR106_2: 
NetR117_1: 
NetR118_1: 
NetR118_2: 
NetR120_2: 
NetR121_2: 
NetT1_6: 
NetT2_4: 
NetVD1_K: 
NetZ23_2: 
NetZ25_3: 
NetZ29_4: 
NetZ29_6: 
NetZ59_3: 
NetZ78_3: 
NetZ79_3: 
NetZ80_3: 
NetZ83_3: 
NetZ91_2: 
NetZ104_2: 
NetZ105_2: 
NetZ112_1: 
NHPLL_MUX_UP: 
NZPLL_MUX_UP: 
OSC_LMX1_IN_N: C33.2 C33_1.1 | length 12.3
  TopLayer w0.2: C33.2 1002.108,546.975 1001.648,546.975 1001.156,547.468 1001.156,549.599 cw(c1001.956,549.599) 1001.956,550.4 1002.436,550.4 ccw(c1002.436,552.277) 1004.312,552.277 1004.312,553.461 1003.484,554.289 1003.484,554.749 C33_1.1
OSC_LMX1_IN_P: C32.2 C32_1.1 | length 12.3
  TopLayer w0.2: C32.2 1001.4,546.268 1001.4,546.728 1000.806,547.323 1000.806,549.599 cw(c1001.956,549.599) 1001.956,550.75 1002.436,550.75 ccw(c1002.436,552.277) 1003.962,552.277 1003.962,553.316 1003.229,554.049 1002.77,554.049 C32_1.1
OSC_LMX1_N: C33.1 L2.3 R12.1 | length 3.6
  TopLayer w0.2: C33.1 1003.516,545.567 1003.642,545.567 1003.869,545.34 1003.869,545.214 R12.1 1004.046,544.102 1004.416,543.732 1004.782,543.732 1005.125,544.075 L2.3
OSC_LMX1_P: C32.1 L2.2 R12.2 | length 3.7
  TopLayer w0.2: C32.1 R12.2 1003.339,544.311 1003.697,543.953 1003.697,543.746 ; 1003.697,543.746 ccw(c1004.062,543.747) 1004.062,543.382 1004.968,543.382 1005.125,543.225 L2.2
OSC_LMX2_IN_N: 
OSC_LMX2_IN_P: 
OSC_LMX2_N: 
OSC_LMX2_P: 
PS_DDR4_DQS8_N:  | length 17.5
  MidLayer1 w0.11: 1013.946,535.451 1015.828,537.333 1016.846,537.333 1020.59,541.076 ccw(c1020.464,541.202) 1020.59,541.328 1020.417,541.501 ccw(c1020.291,541.375) 1020.166,541.501 1017.682,539.017 cw(c1017.408,539.292) 1017.134,539.017 1016.961,539.19 cw(c1017.235,539.464) 1016.961,539.739 1018.905,541.682
PS_DDR4_DQS8_P:  | length 17.5
  MidLayer1 w0.11: 1014.095,535.302 1015.915,537.123 1016.933,537.123 1020.738,540.928 ccw(c1020.464,541.202) 1020.738,541.476 1020.566,541.649 ccw(c1020.291,541.375) 1020.017,541.649 1017.534,539.166 cw(c1017.408,539.292) 1017.282,539.166 1017.11,539.339 cw(c1017.235,539.464) 1017.11,539.59 1019.053,541.534
REF_200M_01: 
REF_200M_N: 
REF_200M_P: 
RF_CH1: 
RF_CH2: 
SHPLL_A: 
SHPLL_B: 
SHPLL_CAL: 
SHPLL_CPSW: 
SHPLL_CPSW#: 
SHPLL_CS#: 
SHPLL_PLR: 
SHPLL_PLR#: 
SHPLL_SCK: 
SHPLL_SDI: 
SHPLL_SYNC: 
SRFSW_A: 
SRFSW_A#: 
SRFSW_B: 
SRFSW_B#: 
SSW_HF#: 
SZPLL_CAL: 
SZPLL_CPSW: 
SZPLL_CPSW#: 
SZPLL_CS#: 
SZPLL_PLR: 
SZPLL_PLR#: 
SZPLL_SCK: 
SZPLL_SDI: 
SZPLL_SYNC: 
SZPLL_TST: 
TCH1#_UP: 
TCH2#_UP: 
THFB_ATT_UP: 
THPLL_A_UP: 
THPLL_B_UP: 
THPLL_CAL_UP: 
THPLL_CPSW_UP: 
THPLL_CS#_UP: 
THPLL_PLR_UP: 
THPLL_SCK_UP: 
THPLL_SDI_UP: 
THPLL_SYNC_UP: 
TRFSWA_UP: 
TRFSWB_UP: 
TSW_HF#_UP: 
TZPLL_CAL_UP: 
TZPLL_CPSW_UP: 
TZPLL_CS#_UP: 
TZPLL_PLR_UP: 
TZPLL_SCK_UP: 
TZPLL_SDI_UP: 
TZPLL_SYNC_UP: 
TZPLL_TST_UP: 
ZPLL_100M_UP: 
ZPLL_CP: 
ZPLL_HF: 
ZPLL_HF_N: 
ZPLL_HF_OUT_N: 
ZPLL_HF_OUT_P: 
ZPLL_HF_P: 
ZPLL_LF: 
ZPLL_LF_90M: 
ZPLL_MUX: 
ZPLL_N: C21.2 L2.4 | length 11.5
  TopLayer w0.2: L2.4 1007.175,544.075 1007.425,543.825 1007.765,543.825 1008.21,544.27 1008.315,544.27 1008.76,543.825 1009.134,543.825 cw(c1009.134,543.119) 1009.84,543.119 1009.84,542.304 ccw(c1010.195,542.304) 1010.195,541.949 1010.358,541.949 ccw(c1010.358,542.304) 1010.713,542.304 1010.713,543.119 cw(c1011.419,543.119) 1011.419,543.825 1011.625,543.825 1013.175,545.375 1014.075,545.375 C21.2
ZPLL_OUT: 
ZPLL_P: C20.2 L2.1 | length 11.5
  TopLayer w0.2: L2.1 1007.175,543.225 1007.425,543.475 1009.134,543.475 cw(c1009.134,543.119) 1009.49,543.119 1009.49,542.304 ccw(c1010.195,542.304) 1010.195,541.599 1010.358,541.599 ccw(c1010.358,542.304) 1011.063,542.304 1011.063,543.119 cw(c1011.419,543.119) 1011.419,543.475 1011.77,543.475 1012.157,543.863 1012.734,543.863 ccw(c1012.734,544.061) 1012.932,544.061 1012.932,544.638 1013.32,545.025 1014.075,545.025 C20.2
ZPLL_VT: 
pads on no net: C32_1.2 C33_1.2 D4.3 D4.4 D4.9 D4.10
copper on no net: | length 15.8
  TopLayer w0.2: 1001.743,540.979 1001.743,539.082 1002.724,539.082 1002.724,540.979 ; 1011.829,552.5 cw(c1011.829,551.179) 1012.49,552.323 cw(c1011.829,551.179) 1012.973,551.84 cw(c1011.829,551.179) 1013.15,551.179 ; 1011.99,543.119 1011.99,541.804 ccw(c1012.696,541.804) 1012.696,541.099 1012.859,541.099 ccw(c1012.859,541.804) 1013.564,541.804 1013.564,543.119 ; 1012.34,543.119 1012.34,541.804 ccw(c1012.696,541.804) 1012.696,541.449 1012.859,541.449 ccw(c1012.859,541.804) 1013.214,541.804 1013.214,543.119

## Silkscreen, mask and mechanical layers (free items; w line width, h text height)
Mechanical 4:
  lines w0.15: 1000,533.5 1055.714,533.5 1055.714,572.574 1000,572.574 1000,533.5